# Altium PCB PCB1.PcbDoc
Units mil, origin at the board's own origin, x right, y up, seen from the top; angles counter-clockwise.
Board outline 3150 x 1968.5 mil, 4 copper layers (Top Layer, GROUND, POWER, Bottom Layer), stack 23.756 mil thick; 89 components, 50 nets, 355 pads, 6 vias.
Unrouted connection lines stored in the file: 190.
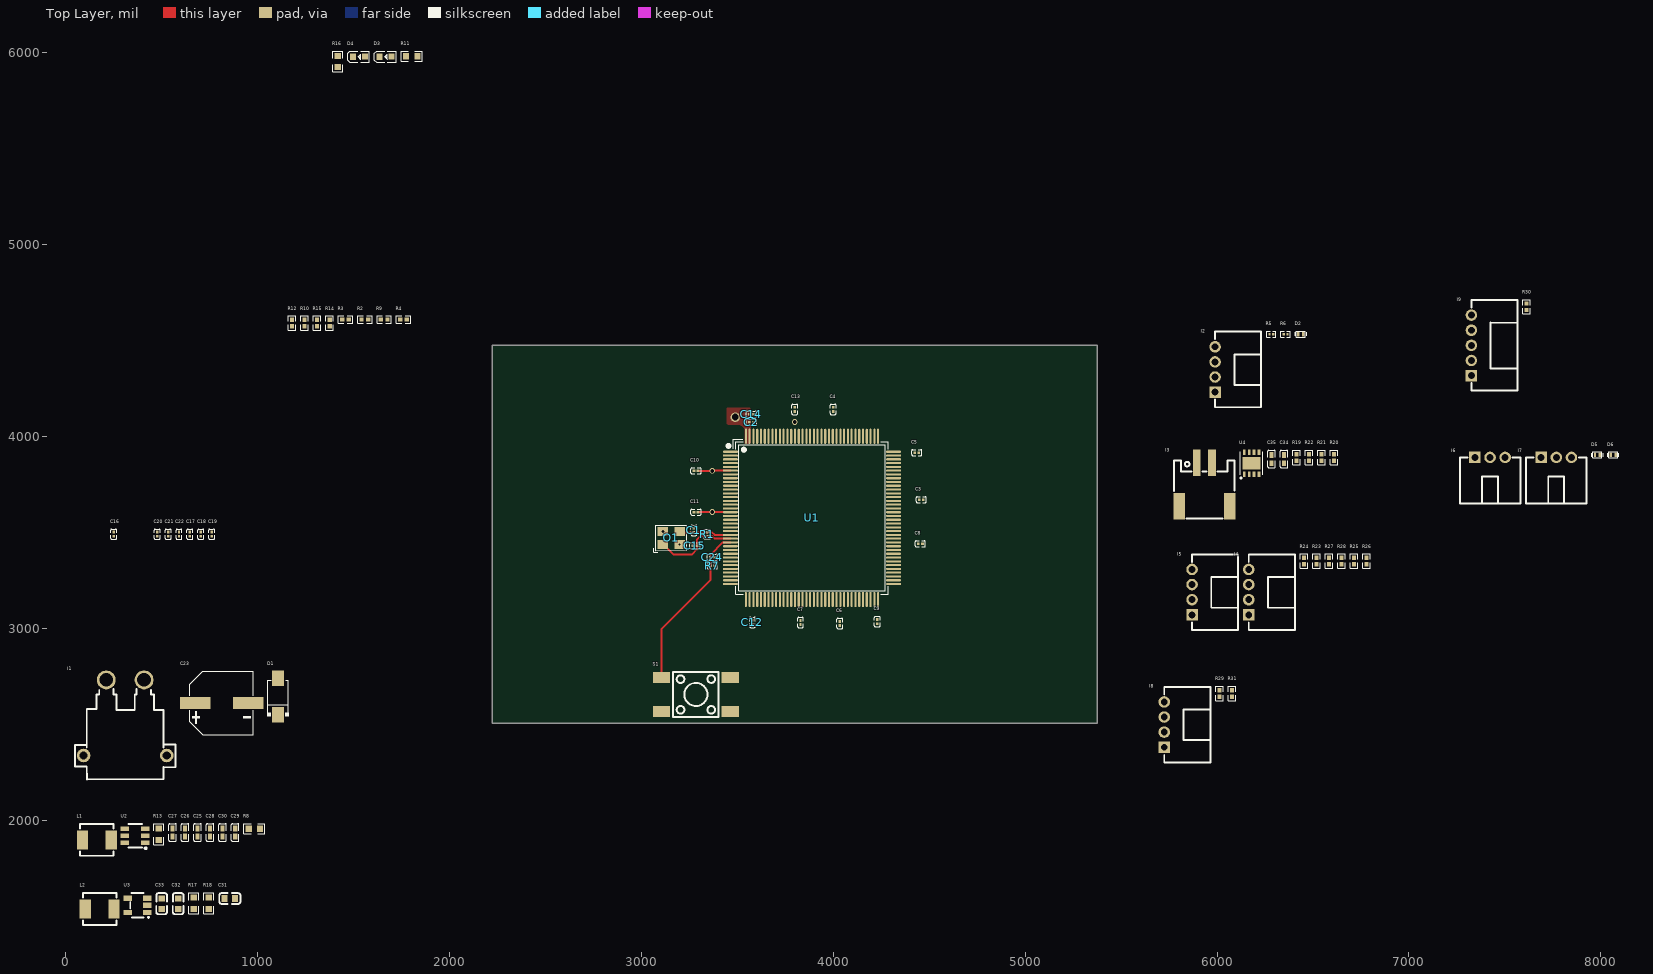
[diagram p0: Top Layer view]
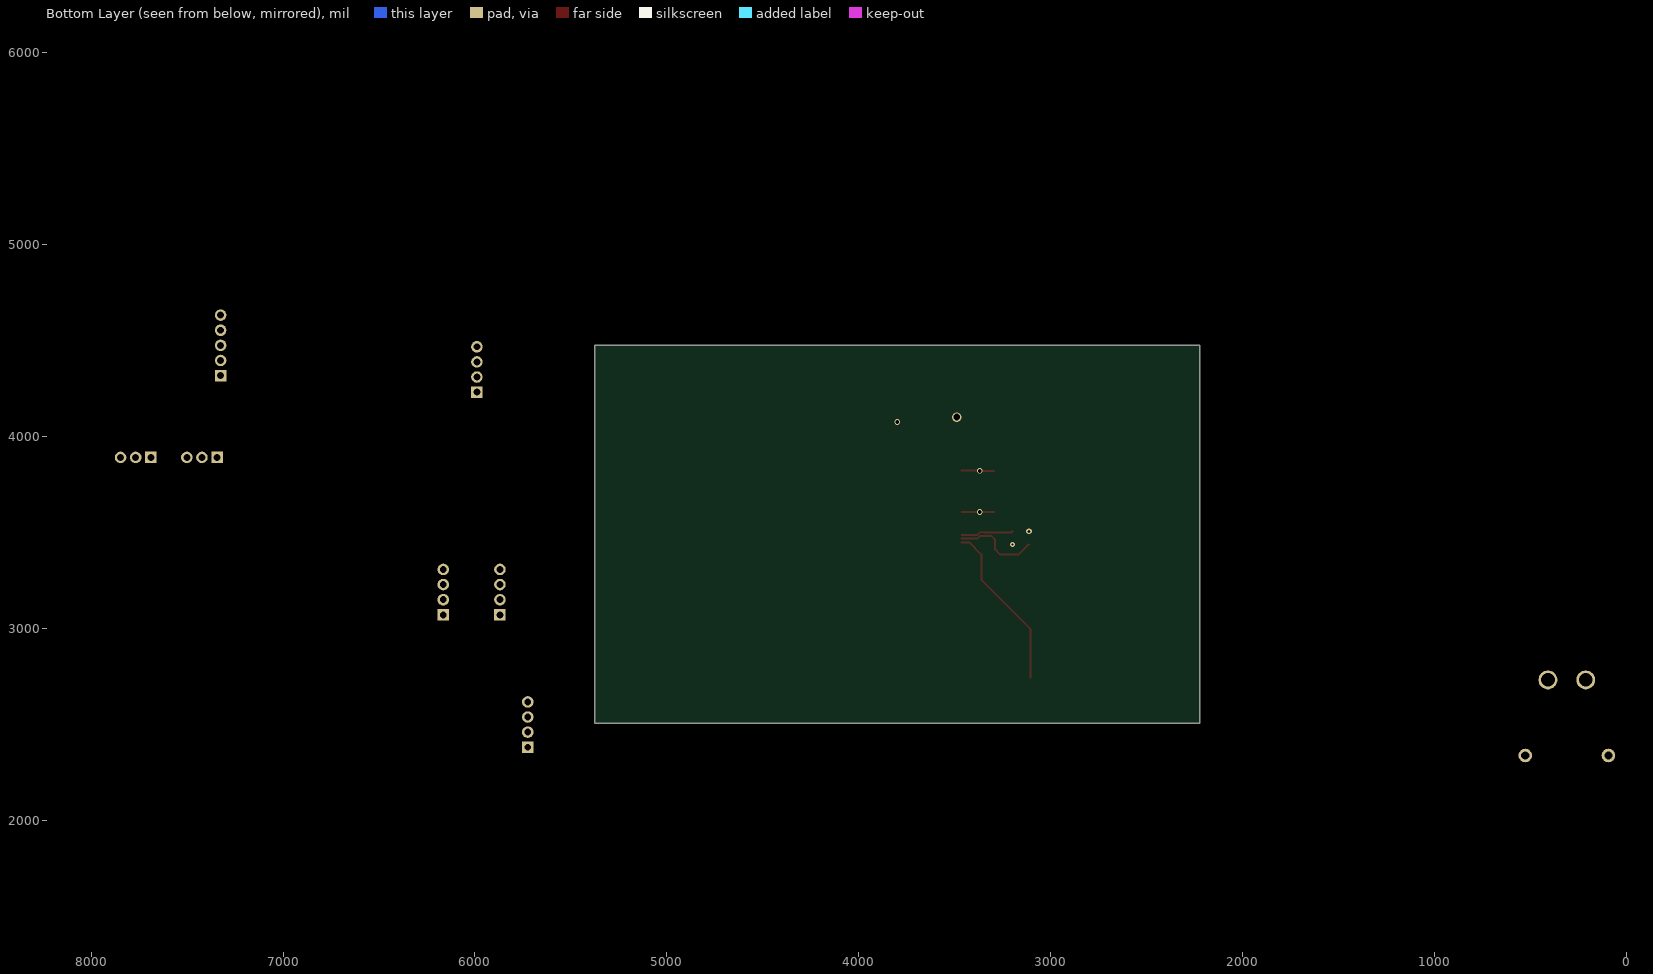
[diagram p1: Bottom Layer view, seen from below]
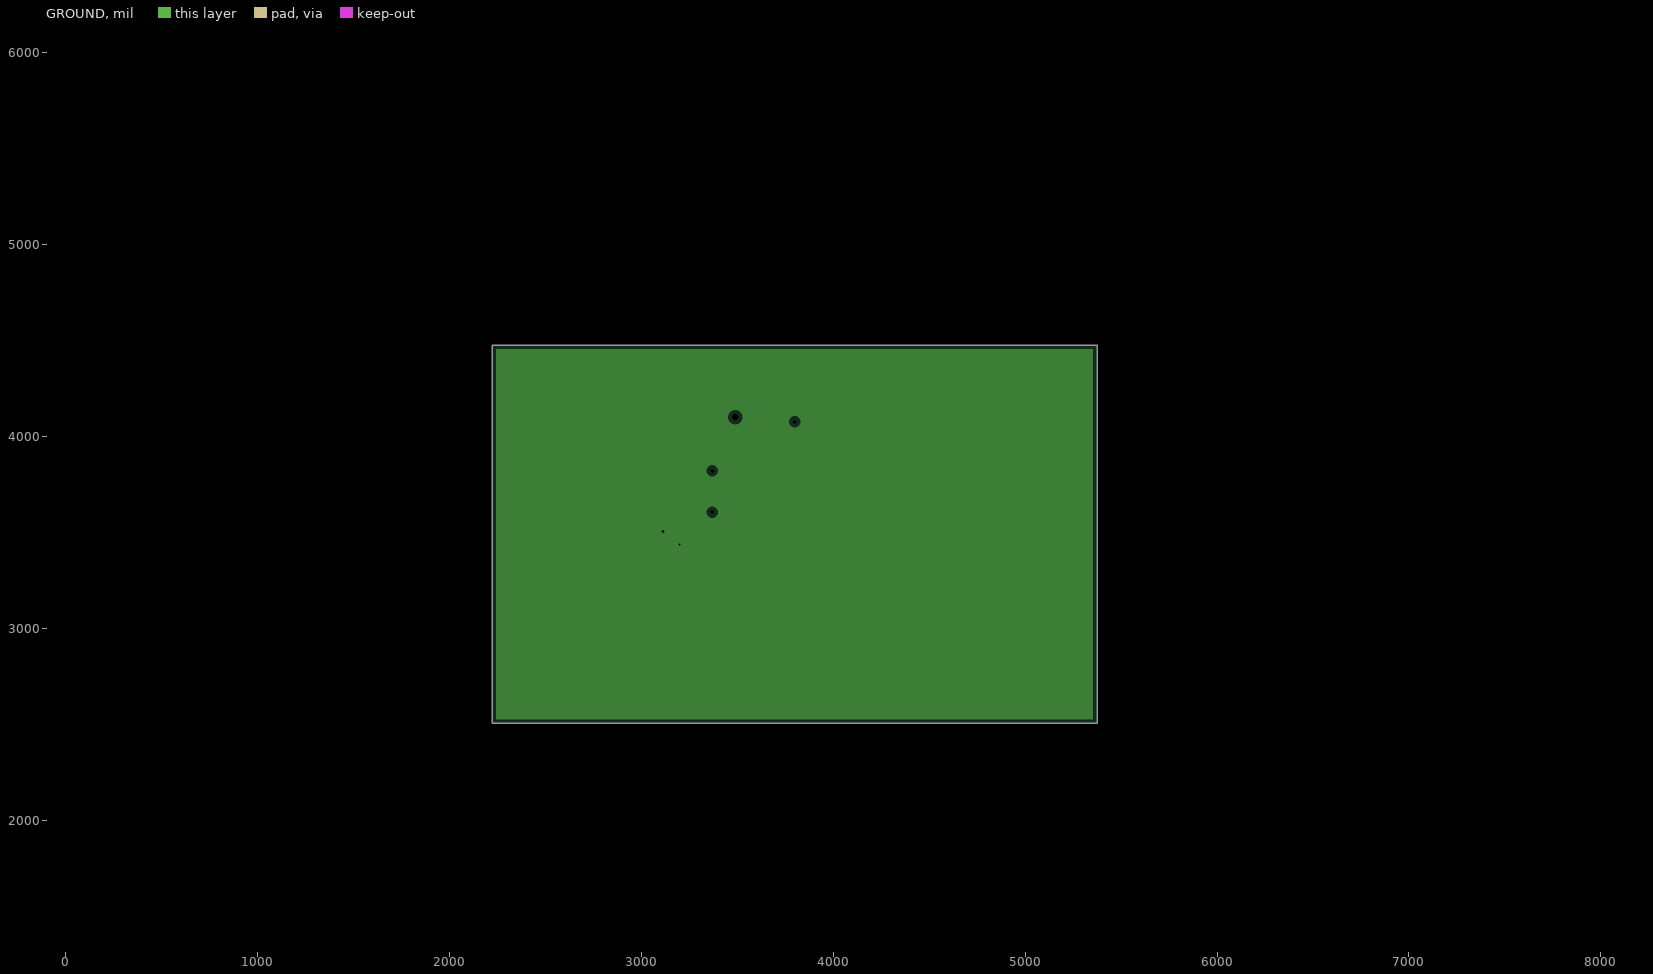
[diagram p2: GROUND, clearances drawn from the general rule]
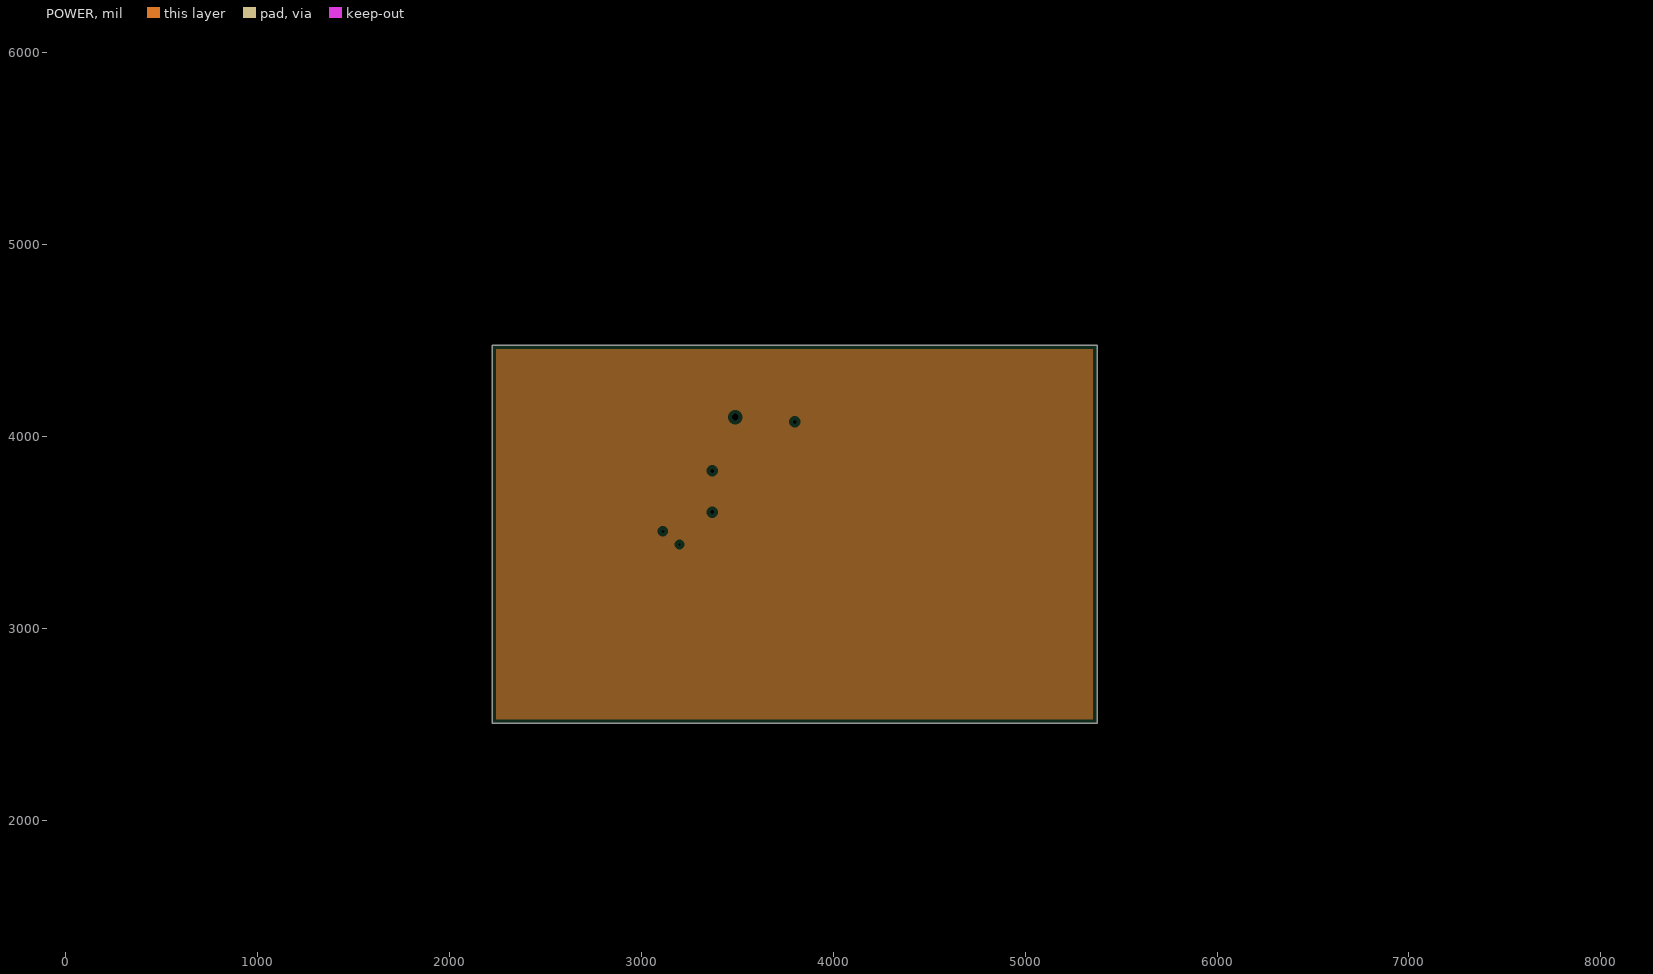
[diagram p3: POWER, clearances drawn from the general rule]

## Layer stack, top to bottom
Top Solder: solder mask 0.4, Solder Resist, Dk 3.5
Top Layer: signal copper 1.4
Dielectric 2: prepreg 2.8, PP-006, Dk 4.1
GROUND: plane copper 1.378, net GND
Dielectric 1: dielectric 12.6, FR-4, Dk 4.8
POWER: plane copper 1.378
Dielectric 3: prepreg 2.8, PP-006, Dk 4.1
Bottom Layer: signal copper 1.4
Bottom Solder: solder mask 0.4, Solder Resist, Dk 3.5

## Board outline
2225,2505 5375,2505 5375,4473.5 2225,4473.5

## Design rules (kind name [scope] priority, off if disabled: settings)
Clearance Clearance_1 [All] p1: gap=1 ignorepadtopadclearanceinfootprint=TRUE
Clearance [All] p2 off: gap=10 ignorepadtopadclearanceinfootprint=FALSE except(0: Arc-Hole Track-Hole SMDPad-Hole THPad-Hole Via-Hole Fill-Hole Poly-Hole Region-Hole Text-Hole)
Clearance Clearance_4 [All] p3 off: gap=10 ignorepadtopadclearanceinfootprint=FALSE except(0: Arc-Hole Track-Hole SMDPad-Hole THPad-Hole Via-Hole Fill-Hole Poly-Hole Region-Hole Text-Hole)
Clearance Clearance_3 [All] p4 off: gap=10 ignorepadtopadclearanceinfootprint=FALSE except(0: Arc-Hole Track-Hole SMDPad-Hole THPad-Hole Via-Hole Fill-Hole Poly-Hole Region-Hole Text-Hole)
Clearance Clearance_2 [All] p5 off: gap=10 ignorepadtopadclearanceinfootprint=FALSE except(0: Arc-Hole Track-Hole SMDPad-Hole THPad-Hole Via-Hole Fill-Hole Poly-Hole Region-Hole Text-Hole)
Clearance constraint [All] p6 off: gap=10 ignorepadtopadclearanceinfootprint=FALSE except(0: Arc-Hole Track-Hole SMDPad-Hole THPad-Hole Via-Hole Fill-Hole Poly-Hole Region-Hole Text-Hole; 5: Arc-Arc Arc-Track Arc-SMDPad Arc-Fill Arc-Poly Arc-Region Track-Track Track-SMDPad Track-Fill Track-Poly Track-Region SMDPad-SMDPad)
HoleSize [All] p1: absolutevalues=TRUE maxlimit=1000 minlimit=1 maxpercent=80.000 minpercent=20.000
MinimumSolderMaskSliver [All] p1: minsoldermaskwidth=1
PlaneClearance [All] p1: clearance=20
PlaneConnect [All] p1: planeconnectstyle=Relief reliefexpansion=20 reliefentries=4 reliefconductorwidth=10 reliefairgap=10
PolygonConnect [All] p1: connectstyle=Direct reliefconductorwidth=10 reliefentries=4 polygonreliefangle="90 Angle" airgapwidth=10
RoutingVias [All] p1: holewidth=28 width=50 viastyle="Through Hole" minholewidth=28 minwidth=50 maxholewidth=28 maxwidth=50
SolderMaskExpansion [All] p1: expansion=4 istentingtop=FALSE
Width [All] p1: maxlimit=10 minlimit=10 preferedwidth=10
26 further rules are at their usual default settings.

## Components (designator, comment, footprint, x,y, rotation, side; value= is the part's Value field where it differs from the comment)
C1 "20PF" C_0201 3275,3510 r270 top
C2 "10uF" C_0201 3574.2,4072.5 r0 top
C3 "100nF" C_0201 4459.2,3670 r0 top
C4 "100nF" C_0201 4000,4140 r90 top
C5 "100nF" C_0201 4435.8,3915 r0 top
C6 "100nF" C_0201 4035,3025 r270 top
C7 "100nF" C_0201 3830,3030 r270 top
C8 "100nF" C_0201 4454.2,3440 r0 top
C9 "100nF" C_0201 4230,3034.2 r270 top
C10 "100nF" C_0201 3285.8,3820 r180 top
C11 "100nF" C_0201 3285.8,3605 r180 top
C12 "100nF" C_0201 3580,3030.8 r270 top
C13 "100nF" C_0201 3800,4140 r90 top
C14 "100nF" C_0201 3574.2,4115 r0 top
C15 "20PF" C_0201 3280,3430 r0 top
C16 "2.2uF" C_0201 251.89,3489.95 r90 top
C17 "100nF" C_0201 649.18,3489.95 r90 top
C18 "1uF" C_0201 705.94,3489.95 r90 top
C19 "100nF" C_0201 762.69,3489.95 r90 top
C20 "1uF" C_0201 478.91,3489.95 r90 top
C21 "100nF" C_0201 535.67,3489.95 r90 top
C22 "2.2uF" C_0201 592.43,3489.95 r90 top
C23 "C_A" C_8*10.5 815.16,2610.61 r0 top
C24 "100nF" C_0201 3370.8,3370 r180 top
C25 "22uF" C_0402 689.43,1935.99 r90 top
C26 "104" C_0402 624.17,1935.99 r90 top
C27 "220pF" C_0402 558.91,1935.99 r90 top
C28 "104" C_0402 754.69,1935.99 r90 top
C29 "104" C_0402 885.21,1935.99 r90 top
C30 "22uF" C_0402 819.95,1935.99 r90 top
C31 "22pF" C_0603 857.47,1591.83 r0 top
C32 "10uF" C_0603 588.15,1565.28 r90 top
C33 "10uF" C_0603 502.02,1565.28 r90 top
C34 "100nF" C_0402 6349.33,3880.99 r90 top
C35 "100nF" C_0402 6284.07,3880.99 r90 top
D1 "SMAJ5.0A" SMAJ5.0A 1108.38,2645.07 r90 top
D2 "PESD5V0F1BL" PESD5V0F1BL 6436.6,4532.68 r0 top
D3 "LED" LED_0603 1663.91,5977.26 r0 top
D4 "LED" LED_0603 1524.62,5977.26 r0 top
D5 "PESD5V0F1BL" PESD5V0F1BL 7981.42,3902.68 r0 top
D6 "PESD5V0F1BL" PESD5V0F1BL 8064.41,3902.68 r0 top
I1 "XT30PW-M" XT30PW-M 311.82,2533.94 r0 top
I2 "PH2.0-4P" PH2.0-4P 5990,4348.15 r90 top
I3 "PH2.0-2P" PH2.0-2P 5934.37,3748.89 r0 top
I4 "PH2.0-4P" PH2.0-4P 6165.2,3188.15 r90 top
I5 "PH2.0-4P" PH2.0-4P 5870,3188.15 r90 top
I6 "PH2.0-3P" PH2.0-3P 7422.48,3890 r0 top
I7 "PH2.0-3P" PH2.0-3P 7767.44,3890 r0 top
I8 "PH2.0-4P" PH2.0-4P 5725,2498.15 r90 top
I9 "PH2.0-5P" PH2.0-5P 7325,4473.78 r90 top
L1 "3.3uH" L_0402 164.33,1897.32 r0 top
L2 "1uH" L_0402 179.33,1537.32 r0 top
O1 "Oscillator" Oscillator 3156.69,3470.55 r0 top
R1 "1M" R_0201 3345,3490.49 r90 top
R2 "10K" R_0402 1560.7,4607.37 r0 top
R3 "12R" R_0402 1460.36,4607.37 r0 top
R4 "12R" R_0402 1761.4,4607.37 r0 top
R5 "100R" R_0201 6282.68,4531.62 r0 top
R6 "100R" R_0201 6357.63,4531.62 r0 top
R7 "10K" R_0201 3371.6,3325 r0 top
R8 "73.2K" R_0603 985.37,1955.99 r0 top
R9 "12R" R_0402 1661.06,4607.37 r0 top
R10 "12R" R_0402 1247.03,4589.82 r90 top
R11 "1K" R_0603 1804.14,5980.99 r0 top
R12 "12R" R_0402 1181.77,4589.82 r90 top
R13 "10K" R_0603 487.28,1927.47 r90 top
R14 "12R" R_0402 1377.55,4589.82 r90 top
R15 "12R" R_0402 1312.29,4589.82 r90 top
R16 "1K" R_0603 1419.01,5952.47 r90 top
R17 "100K" R_0603 670.11,1567.47 r90 top
R18 "22.1K" R_0603 748.12,1567.47 r90 top
R19 "0R" R_0402 6414.59,3889.82 r90 top
R20 "120R" R_0402 6610.37,3889.82 r90 top
R21 "0R" R_0402 6545.11,3889.82 r90 top
R22 "33R" R_0402 6479.85,3889.82 r90 top
R23 "4.7K" R_0402 6518.29,3349.82 r90 top
R24 "4.7K" R_0402 6453.03,3349.82 r90 top
R25 "33R" R_0402 6714.07,3349.82 r90 top
R26 "33R" R_0402 6779.33,3349.82 r90 top
R27 "4.7K" R_0402 6583.55,3349.82 r90 top
R28 "4.7K" R_0402 6648.81,3349.82 r90 top
R29 "2.2K" R_0402 6012.83,2659.82 r90 top
R30 "33R" R_0402 7612.83,4674.82 r90 top
R31 "2.2K" R_0402 6078.09,2659.82 r90 top
S1 "SWITCH-4P" SWITCH-4P 3285,2655 r0 top
U1 "STM32F407ZGT6" STM32F407ZGT6 3890,3575 r270 top
U2 "RY8121" RY8121 363.46,1918.98 r0 top
U3 "SY8089A1AAC" SY8089A1AAC 376.26,1556.65 r0 top
U4 "TJA1044GTK/3Z" TJA1044GTK/3Z 6179.85,3859.6 r0 top

## Footprints (in the part's own frame and the unit in brackets; to place one, negate y for a bottom-side part, rotate by r counter-clockwise, add the part's x,y. Pads: shape width x height; smd on the part's side, far side on the other; paste and mask are expansions set on the pad)
C_8*10.5 [mm] "贴片铝电解电容8*10.5"
  rect 4x1.6 smd: 1(-3.5,0) 2(3.5,0)
  silkscreen extent -4.23,-4.23 4.18,4.23
C_0201 [mil] "贴片电容"
  rect 14.51x12.76 smd paste-3937.01 mask+2: 1(-10.8,0) 2(10.8,0)
  silkscreen extent -27,-15 27,15
C_0402 [mm] "贴片电容"
  rect 0.79x0.54 smd paste-100 mask+0.051: 1(-0.545,0) 2(0.545,0)
  silkscreen extent -1.17,-0.5 1.17,0.5
C_0603 [mm] "贴片电容"
  rect 0.8x0.9 smd: 1(-0.7,0) 2(0.7,0)
  silkscreen extent -1.41,-0.71 1.39,0.72
L_0402 [mm] "4.2*4.2*1.8"
  rect 1.5x2.5 smd: 1(-1.9,0) 2(1.9,0)
  silkscreen extent -2.2,-2.1 2.2,2.1
LED_0603 [mm] "发光二极管"
  rect 0.8x0.8 smd: 1(-0.672,-0.003) 2(0.926,0.003)
  silkscreen extent -1.36,-0.75 1.52,0.76
Oscillator [mm] "晶振4P-SMD3325"
  rect 1.4x1.2 smd: 1(-1.1,-0.875) 2(1.1,-0.875) 3(1.1,0.875) 4(-1.1,0.875)
  silkscreen extent -2.29,-1.9 2.03,1.65
PESD5V0F1BL [mm] "双向TVS"
  rect 0.3x0.6 smd paste+0 mask+0.05: 1(-0.325,0) 2(0.325,0)
  silkscreen extent -0.75,-0.4 0.75,0.4
PH2.0-2P [mm] "卧贴"
  rect 1x3.5 smd paste+0 mask+0.05: 1(-1,2.85) 2(1,2.85)
  rect 1.5x3.5 smd paste+0 mask+0.05: 4(3.35,-2.85) 5(-3.35,-2.85)
  silkscreen extent -4.05,-4.47 4,3.2
PH2.0-3P [mil] "弯插"
  rect 60x60 hole 36: 1(-78.74,0)
  round 60 hole 36: 2(0,0) 3(78.74,0)
  silkscreen extent -157,-240 157,0
PH2.0-4P [mil] "弯插"
  rect 60x60 hole 36: 1(-118.11,0)
  round 60 hole 36: 2(-39.37,0) 3(39.37,0) 4(118.11,0)
  silkscreen extent -197,-240 197,0
PH2.0-5P [mil] "弯插"
  rect 60x60 hole 36: 1(-157.48,0)
  round 60 hole 36: 2(-78.74,0) 3(0,0) 4(78.74,0) 5(157.48,0)
  silkscreen extent -236,-240 236,0
R_0201 [mil] "贴片电阻"
  rect 11.93x12.76 smd paste-3937.01 mask+2: 1(-9.51,0) 2(9.51,0)
  silkscreen extent -24,-15 24,15
R_0402 [mm] "贴片电阻"
  rect 0.566x0.54 smd paste-100 mask+0.051: 1(-0.433,0) 2(0.433,0)
  silkscreen extent -0.94,-0.5 0.94,0.5
R_0603 [mil] "贴片电阻"
  rect 31.75x34.02 smd paste-3937.01 mask+2: 1(-29.66,0) 2(29.66,0)
  silkscreen extent -55,-26 55,26
RY8121 [mm] "DC-DC"
  rect 1.1x0.6 smd paste+0 mask+0.051: 1(1.35,-0.95) 2(1.35,0) 3(1.35,0.95) 4(-1.35,0.95) 5(-1.35,0) 6(-1.35,-0.95)
  silkscreen extent -0.9,-1.78 1.52,1.55
SMAJ5.0A [mm] "TVS"
  rect 2.046x1.62 smd: 1(-2.404,-0.009) 2(2.404,0.009)
  silkscreen extent -2.61,-1.44 2.16,1.44
STM32F407ZGT6 [mm] "LQFP-144"
  oval 0.28x2 smd: 1(-8.75,-10.8) 2(-8.25,-10.8) 3(-7.75,-10.8) 4(-7.25,-10.8) 5(-6.75,-10.8) 6(-6.25,-10.8) 7(-5.75,-10.8) 8(-5.25,-10.8) 9(-4.75,-10.8) 10(-4.25,-10.8) 11(-3.75,-10.8) 12(-3.25,-10.8) 13(-2.75,-10.8) 14(-2.25,-10.8) 15(-1.75,-10.8) 16(-1.25,-10.8) 17(-0.75,-10.8) 18(-0.25,-10.8) 19(0.25,-10.8) 20(0.75,-10.8) 21(1.25,-10.8) 22(1.75,-10.8) 23(2.25,-10.8) 24(2.75,-10.8) 25(3.25,-10.8) 26(3.75,-10.8) 27(4.25,-10.8) 28(4.75,-10.8) 29(5.25,-10.8) 30(5.75,-10.8) 31(6.25,-10.8) 32(6.75,-10.8) 33(7.25,-10.8) 34(7.75,-10.8) 35(8.25,-10.8) 36(8.75,-10.8) 73(8.75,10.8) 74(8.25,10.8) 75(7.75,10.8) 76(7.25,10.8) 77(6.75,10.8) 78(6.25,10.8) 79(5.75,10.8) 80(5.25,10.8) 81(4.75,10.8) 82(4.25,10.8) 83(3.75,10.8) 84(3.25,10.8) 85(2.75,10.8) 86(2.25,10.8) 87(1.75,10.8) 88(1.25,10.8) 89(0.75,10.8) 90(0.25,10.8) 91(-0.25,10.8) 92(-0.75,10.8) 93(-1.25,10.8) 94(-1.75,10.8) 95(-2.25,10.8) 96(-2.75,10.8) 97(-3.25,10.8) 98(-3.75,10.8) 99(-4.25,10.8) 100(-4.75,10.8) 101(-5.25,10.8) 102(-5.75,10.8) 103(-6.25,10.8) 104(-6.75,10.8) 105(-7.25,10.8) 106(-7.75,10.8) 107(-8.25,10.8) 108(-8.75,10.8)
  oval 2x0.28 smd: 37(10.8,-8.75) 38(10.8,-8.25) 39(10.8,-7.75) 40(10.8,-7.25) 41(10.8,-6.75) 42(10.8,-6.25) 43(10.8,-5.75) 44(10.8,-5.25) 45(10.8,-4.75) 46(10.8,-4.25) 47(10.8,-3.75) 48(10.8,-3.25) 49(10.8,-2.75) 50(10.8,-2.25) 51(10.8,-1.75) 52(10.8,-1.25) 53(10.8,-0.75) 54(10.8,-0.25) 55(10.8,0.25) 56(10.8,0.75) 57(10.8,1.25) 58(10.8,1.75) 59(10.8,2.25) 60(10.8,2.75) 61(10.8,3.25) 62(10.8,3.75) 63(10.8,4.25) 64(10.8,4.75) 65(10.8,5.25) 66(10.8,5.75) 67(10.8,6.25) 68(10.8,6.75) 69(10.8,7.25) 70(10.8,7.75) 71(10.8,8.25) 72(10.8,8.75) 109(-10.8,8.75) 110(-10.8,8.25) 111(-10.8,7.75) 112(-10.8,7.25) 113(-10.8,6.75) 114(-10.8,6.25) 115(-10.8,5.75) 116(-10.8,5.25) 117(-10.8,4.75) 118(-10.8,4.25) 119(-10.8,3.75) 120(-10.8,3.25) 121(-10.8,2.75) 122(-10.8,2.25) 123(-10.8,1.75) 124(-10.8,1.25) 125(-10.8,0.75) 126(-10.8,0.25) 127(-10.8,-0.25) 128(-10.8,-0.75) 129(-10.8,-1.25) 130(-10.8,-1.75) 131(-10.8,-2.25) 132(-10.8,-2.75) 133(-10.8,-3.25) 134(-10.8,-3.75) 135(-10.8,-4.25) 136(-10.8,-4.75) 137(-10.8,-5.25) 138(-10.8,-5.75) 139(-10.8,-6.25) 140(-10.8,-6.75) 141(-10.8,-7.25) 142(-10.8,-7.75) 143(-10.8,-8.25) 144(-10.8,-8.75)
  silkscreen extent -10.41,-11.25 10.08,10.08
SWITCH-4P [mm] "4P-6*6"
  rect 2.3x1.5 smd: 1(-4.55,2.25) 2(4.55,2.25) 3(-4.55,-2.25) 4(4.55,-2.25)
  silkscreen extent -3,-3 3,3
SY8089A1AAC [mm] "DC-DC-Input2.5V-5.5V"
  rect 1.1x0.7 smd: 1(1.294,-0.951) 2(1.294,-0.001) 3(1.294,0.951) 4(-1.294,0.951) 5(-1.294,-0.949)
  silkscreen extent -0.97,-1.65 1.52,1.61
TJA1044GTK/3Z [mil] "CAN"
  rect 14x28 smd: 1(-38.39,-56.4) 2(-12.79,-56.4) 3(12.8,-56.4) 4(38.39,-56.4) 5(38.39,56.4) 6(12.8,56.4) 7(-12.79,56.4) 8(-38.39,56.4)
  rect 94.49x62.99 smd: 9(0,0)
  silkscreen extent -59,-81 59,59
XT30PW-M [mm] "卧式"
  round 2.5 hole 1.8: 1(-2.5,5) 2(2.5,5)
  round 1.8 hole 1.1: 3(5.5,-5) 4(-5.5,-5)
  silkscreen extent -6.65,-8.15 6.65,3.81

## Part data
C1 C15: library part C, "贴片电容"
C2 C3 C4 C5 C6 C7 C8 C9 C10 C11 C12 C13 C14 C16 C17 C18 C19 C20 C21 C22 C24 C25 C26 C27 C28 C29 C30 C31 C32 C33 C34 C35: library part C, "无极性贴片电容"
C23: "铝电解电容"
D1: "TVS"
D2 D5 D6: "双向TVS"
D3 D4: "发光二极管"
I1: "卧式公头"
I3: "卧贴"
I6 I7: "PH3.0-3P弯插"
I9: "弯插"
L1 L2: library part L, "SMD电感4.2*4.2*1.8"
O1: "晶振"
R1: library part R, "电阻"
R2 R3 R4 R5 R6 R7 R8 R9 R10 R11 R12 R13 R14 R15 R16 R17 R18 R19 R20 R21 R22 R23 R24 R25 R26 R27 R28 R29 R30 R31: library part R, "贴片电阻"
U2 U3: "DC-DC"
U4: "CAN"

## Via types
v1: diameter 30, hole 20, Top Layer to Bottom Layer, 3 vias
v2: diameter 50, hole 35, Top Layer to Bottom Layer, 1 vias
v3: diameter 24, hole 12, Top Layer to Bottom Layer, 1 vias
v4: diameter 30, hole 15, Top Layer to Bottom Layer, 1 vias

## Nets (pads, with @x,y where several pads share a name; then routed paths per layer and width w, separated by ;. In a path a pad name is that pad's centre, name@x,y a point inside that pad or via, vN(x,y) a via of type N, cw(c..) or ccw(c..) an arc to the next point about the centre after c; other vN are vias at no path point)
3.3V: C2.1 C3.1 C4.1 C5.1 C6.1 C7.1 C8.1 C9.1 C10.1 C11.1 C12.1 C13.1 C14.1 C17.2 C18.1 C19.1 C20.2 C21.2 C31.2 C32.2 C35.2 D2.2 I2.1 I9.1 L2.2 R7.2 R11.2 R16.2 R17.2 R23.2 R24.2 R27.1 R28.1 R29.2 R31.2 U1.6 U1.17 U1.30 U1.32 U1.33 U1.39 U1.52 U1.62 U1.72 U1.84 U1.95 U1.108 U1.121 U1.131 U1.143 U1.144 U4.5 | length 337
  Top Layer w10: C11.1 v1(3370,3605) 3370.27,3604.73 3464.6,3604.73 U1.17 ; C10.1 v1(3370,3820) 3370.86,3820.86 3464.6,3820.86 U1.6
  other v2: 3490,4100
+5: C25.2 C26.2 C27.2 C33.2 C34.2 I4.3 I5.3 I6.1 I7.1 I8.3 L1.1 R8.2 U3.1 U3.4 U4.3
CAN1_H: I3.1 R19.1
CAN1_RX: R22.1 U1.103
CAN1_TX: R10.1 U4.1
CAN2_L: I3.2 R21.1
GND: C1.1 C2.2 C3.2 C4.2 C5.2 C6.2 C7.2 C8.2 C9.2 C10.2 C11.2 C12.2 C13.2 C14.2 C15.1 C16.1 C17.1 C18.2 C19.2 C20.1 C21.1 C22.2 C23.2 C24.1 C25.1 C26.1 C29.2 C30.2 C32.1 C33.1 C34.1 C35.1 D1.2 D2.1 D4.1 D5.2 D6.2 I1.1 I2.2 I3.4 I3.5 I4.2 I5.2 I6.2 I7.2 I8.2 I9.5 O1.2 O1.4 R2.1 R13.1 R18.1 S1.4 U1.16 U1.31 U1.38 U1.51 U1.61 U1.83 U1.94 U1.107 U1.120 U1.130 U2.2 U3.2 U4.2 U4.8 U4.9
  other v3: 3200,3436.1
  other v4: 3113.38,3505
I2C1_SCL: I8.1 R4.1 R31.1
I2C1_SDA: I8.4 R3.1 R29.1
LED: D3.1 U1.79
NetC16_2: C16.2 U1.71
NetC22_1: C22.1 U1.106
NetC27_1: C27.1 R8.1 R13.2 U2.3
NetC28_1: C28.1 U2.1
NetC28_2: C28.2 L1.2 U2.6
NetC31_1: C31.1 R17.1 R18.2 U3.5
NetD3_2: D3.2 R11.1
NetD4_2: D4.2 R16.1
NetI2_3: I2.3 R6.1
NetI2_4: I2.4 R5.1
NetI4_1: I4.1 R25.1 R27.2
NetI5_1: I5.1 R26.1 R28.2
NetI9_3: I9.3 R30.1
NetL2_1: L2.1 U3.3
NetR2_2: R2.2 U1.138
NetR3_2: R3.2 U1.137
NetR4_2: R4.2 U1.136
NetR9_1: R9.1 U1.41
NetR10_2: R10.2 U1.104
NetR12_2: R12.2 U1.101
NetR14_1: R14.1 U1.43
NetR15_2: R15.2 U1.96
NetR19_2: R19.2 R20.2 U4.7
NetR20_1: R20.1 R21.2 U4.6
NetR22_2: R22.2 U4.4
NRST: C24.2 R7.1 S1.1 U1.25 | length 875.2
  Top Layer w10: S1.1 3105.87,2995.87 3362.09,3252.09 R7.1 3362.09,3370 3362.09,3383.69 3425.25,3446.85 3464.6,3446.85 U1.25
OSC_IN: C1.2 O1.3 R1.2 U1.23 | length 273.2
  Top Layer w10: O1.3 3205.8,3499.2 C1.2 3275.4,3499.6 3344.6,3499.6 R1.2 3368.74,3500 3382.32,3486.42 U1.23
OSC_OUT: C15.2 O1.1 R1.1 U1.24 | length 447.5
  Top Layer w10: O1.1 3117.32,3436.1 3168.42,3385 3265,3385 3290.8,3410.8 3290.8,3460.8 3310.98,3480.98 R1.1 3369.02,3480.98 3383.27,3466.73 U1.24
SPI1_MISO: R30.2 U1.42
SPI1_MOSI: I9.2 R14.2
SPI1_SCK: I9.4 R9.2
SWCLK: R6.2 U1.109
SWDIO: R5.2 U1.105
TIM1_CH1: D5.1 I6.3 U1.60
TIM1_CH2: D6.1 I7.3 U1.64
USART1_RX: R25.2 U1.102
USART1_TX: I4.4 R12.1 R23.1
USART6_RX: R26.2 U1.97
USART6_TX: I5.4 R15.1 R24.1
VCC: C23.1 C29.1 C30.1 D1.1 I1.2 U2.4 U2.5
pads on no net: I1.3 I1.4 S1.2 S1.3 U1.1 U1.2 U1.3 U1.4 U1.5 U1.7 U1.8 U1.9 U1.10 U1.11 U1.12 U1.13 U1.14 U1.15 U1.18 U1.19 U1.20 U1.21 U1.22 U1.26 U1.27 U1.28 U1.29 U1.34 U1.35 U1.36 U1.37 U1.40 U1.44 U1.45 U1.46 U1.47 U1.48 U1.49 U1.50 U1.53 U1.54 U1.55 U1.56 U1.57 U1.58 U1.59 U1.63 U1.65 U1.66 U1.67 U1.68 U1.69 U1.70 U1.73 U1.74 U1.75 U1.76 U1.77 U1.78 U1.80 U1.81 U1.82 U1.85 U1.86 U1.87 U1.88 U1.89 U1.90 U1.91 U1.92 U1.93 U1.98 U1.99 U1.100 U1.110 U1.111 U1.112 U1.113 U1.114 U1.115 U1.116 U1.117 U1.118 U1.119 U1.122 U1.123 U1.124 U1.125 U1.126 U1.127 U1.128 U1.129 U1.132 U1.133 U1.134 U1.135 U1.139 U1.140 U1.141 U1.142
copper on no net:
  other v1: 3800,4075

## Polygon pours and split planes (outlines as drawn)
3.3V on Top Layer "NONET_L01_P-001" (solid, remove dead copper, pour order 1): 3570,4140 ccw(c3560,4140) 3560,4150 3455,4150 ccw(c3455,4140) 3445,4140 3445,4070 ccw(c3455,4070) 3455,4060 3505,4060 cw(c3505,4025) 3540,4025 3540,3965 ccw(c3545,3965) 3545,3960 3565,3960 ccw(c3565,3965) 3570,3965
GND on GROUND (split plane): 5354.9,2525.1 2245.1,2525.1 2245.1,4453.41 5354.9,4453.41
no net on POWER (split plane): 5354.9,2525.1 2245.1,2525.1 2245.1,4453.41 5354.9,4453.41

## Silkscreen, mask and mechanical layers (free items; w line width, h text height)
Mechanical 1:
  the board outline again, w10